# Altium PCB Maxi Gamer 3D - Rev 1.0_2023-02-27.pcbdoc
Units mil, origin at the board's own origin, x right, y up, seen from the top; angles counter-clockwise.
Board outline 3865 x 2599.17 mil, 2 copper layers (Top Layer, Bottom Layer); 2 components, 0 nets, 331 pads, 156 vias.
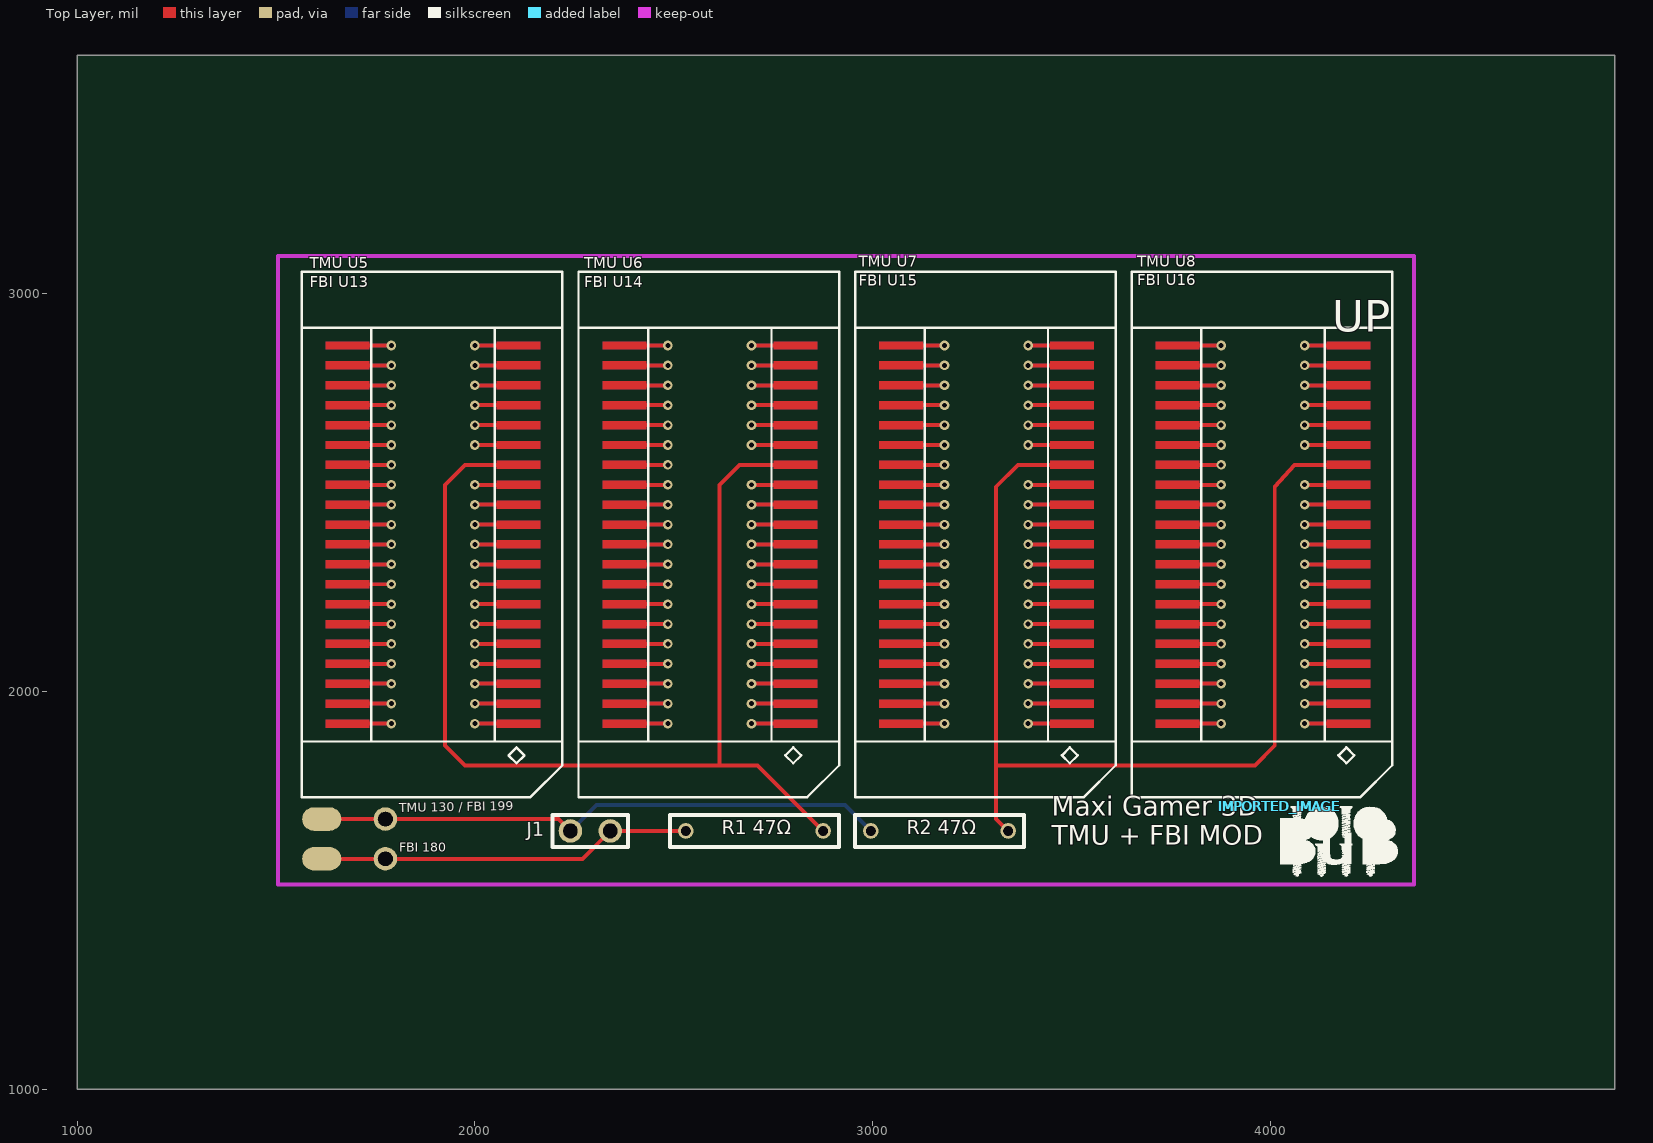
[diagram p0: Top Layer view]
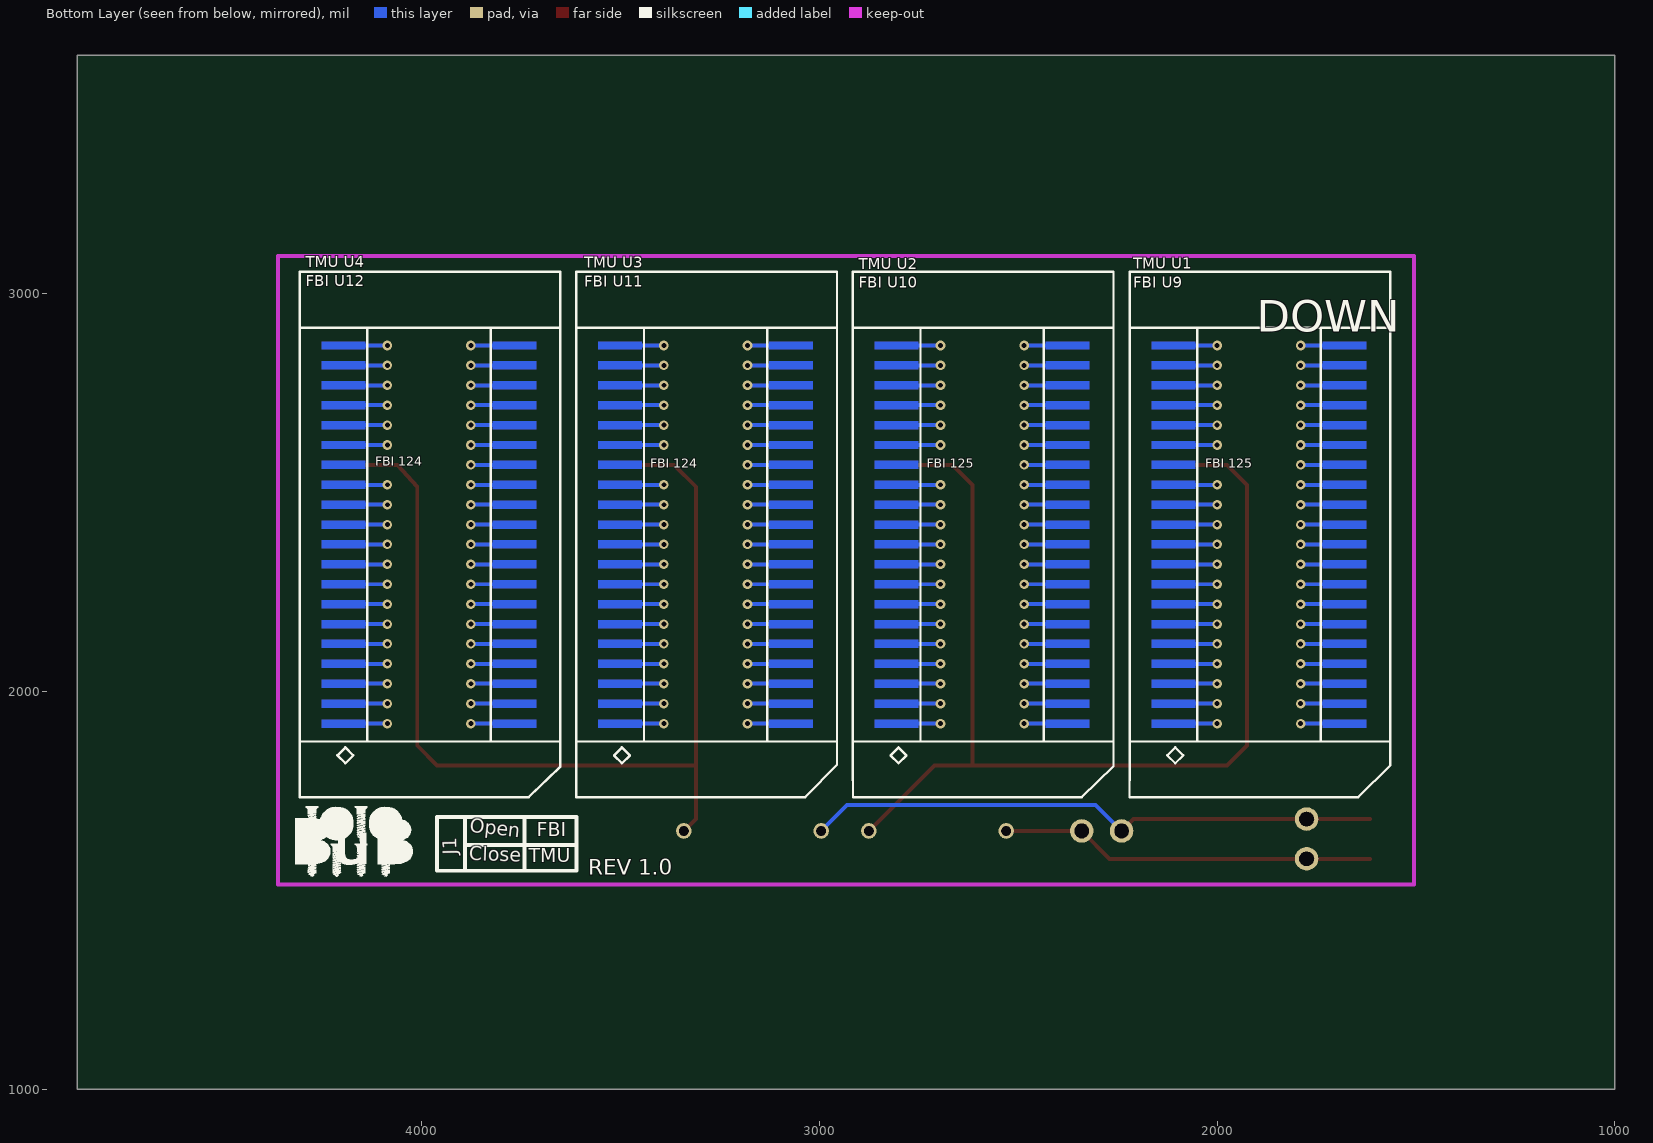
[diagram p1: Bottom Layer view, seen from below]

## Layer stack, top to bottom
Top Layer: signal copper (thickness not stored)
Dielectric: dielectric 12.6, FR-4, Dk 4.8
Bottom Layer: signal copper (thickness not stored)

## Board outline
4865,1000 1000,1000 1000,3599.17 4865,3599.17

## Components (designator, comment, footprint, x,y, rotation, side; value= is the part's Value field where it differs from the comment)
IMPORTED_IMAGE "IMPORTED_IMAGE" IMPORTED_IMAGE 4023.88,1711.23 r0 top
IMPORTED_IMAGE "IMPORTED_IMAGE" IMPORTED_IMAGE 4020.85,1711.23 r0 top

## Footprints (in the part's own frame and the unit in brackets; to place one, negate y for a bottom-side part, rotate by r counter-clockwise, add the part's x,y. Pads: shape width x height; smd on the part's side, far side on the other; paste and mask are expansions set on the pad)
IMPORTED_IMAGE [mil]
  silkscreen extent 0,-177 295,0

## Free pads (board coordinates)
  round 0 smd: 1(2109.36,1919.17) 1(2805.01,1919.17) 1(3500.01,1919.17) 1(4195.01,1919.17) 2(2109.36,1969.17) 2(2805.01,1969.17) 2(3500.01,1969.17) 2(4195.01,1969.17) 3(2109.36,2019.17) 3(2805.01,2019.17) 3(3500.01,2019.17) 3(4195.01,2019.17) 4(2109.36,2069.17) 4(2805.01,2069.17) 4(3500.01,2069.17) 4(4195.01,2069.17) 5(2109.36,2119.17) 5(2805.01,2119.17) 5(3500.01,2119.17) 5(4195.01,2119.17) 6(2109.36,2169.17) 6(2805.01,2169.17) 6(3500.01,2169.17) 6(4195.01,2169.17) 7(2109.36,2219.17) 7(2805.01,2219.17) 7(3500.01,2219.17) 7(4195.01,2219.17) 8(2109.36,2269.17) 8(2805.01,2269.17) 8(3500.01,2269.17) 8(4195.01,2269.17) 9(2109.36,2319.17) 9(2805.01,2319.17) 9(3500.01,2319.17) 9(4195.01,2319.17) 10(2109.36,2369.17) 10(2805.01,2369.17) 10(3500.01,2369.17) 10(4195.01,2369.17) 11(2109.36,2419.17) 11(2805.01,2419.17) 11(3500.01,2419.17) 11(4195.01,2419.17) 12(2109.36,2469.17) 12(2805.01,2469.17) 12(3500.01,2469.17) 12(4195.01,2469.17) 13(2109.36,2519.17) 13(2805.01,2519.17) 13(3500.01,2519.17) 13(4195.01,2519.17) 14(2109.36,2569.17) 14(2805.01,2569.17) 14(3500.01,2569.17) 14(4195.01,2569.17) 15(2109.36,2619.17) 15(2805.01,2619.17) 15(3500.01,2619.17) 15(4195.01,2619.17) 16(2109.36,2669.17) 16(2805.01,2669.17) 16(3500.01,2669.17) 16(4195.01,2669.17) 17(2109.36,2719.17) 17(2805.01,2719.17) 17(3500.01,2719.17) 17(4195.01,2719.17) 18(2109.36,2769.17) 18(2805.01,2769.17) 18(3500.01,2769.17) 18(4195.01,2769.17) 19(2109.36,2819.17) 19(2805.01,2819.17) 19(3500.01,2819.17) 19(4195.01,2819.17) 20(2109.36,2869.17) 20(2805.01,2869.17) 20(3500.01,2869.17) 20(4195.01,2869.17) 21(1679.99,2869.17) 21(2375.64,2869.17) 21(2375.64,2869.17) 21(3070.64,2869.17) 21(3765.64,2869.17) 22(1679.99,2819.17) 22(2375.64,2819.17) 22(3070.64,2819.17) 22(3765.64,2819.17) 23(1679.99,2769.17) 23(2375.64,2769.17) 23(3070.64,2769.17) 23(3765.64,2769.17) 24(1679.99,2719.17) 24(2375.64,2719.17) 24(3070.64,2719.17) 24(3765.64,2719.17) 25(1679.99,2669.17) 25(2375.64,2669.17) 25(3070.64,2669.17) 25(3765.64,2669.17) 26(1679.99,2619.17) 26(2375.64,2619.17) 26(3070.64,2619.17) 26(3765.64,2619.17) 27(1679.99,2569.17) 27(2375.64,2569.17) 27(3070.64,2569.17) 27(3765.64,2569.17) 28(1679.99,2519.17) 28(2375.64,2519.17) 28(3070.64,2519.17) 28(3765.64,2519.17) 29(1679.99,2469.17) 29(2375.64,2469.17) 29(3070.64,2469.17) 29(3765.64,2469.17) 30(1679.99,2419.17) 30(2375.64,2419.17) 30(3070.64,2419.17) 30(3765.64,2419.17) 31(1679.99,2369.17) 31(2375.64,2369.17) 31(3070.64,2369.17) 31(3765.64,2369.17) 32(1679.99,2319.17) 32(2375.64,2319.17) 32(3070.64,2319.17) 32(3765.64,2319.17) 33(1679.99,2269.17) 33(2375.64,2269.17) 33(3070.64,2269.17) 33(3765.64,2269.17) 34(1679.99,2219.17) 34(2375.64,2219.17) 34(3070.64,2219.17) 34(3765.64,2219.17) 35(1679.99,2169.17) 35(2375.64,2169.17) 35(3070.64,2169.17) 35(3765.64,2169.17) 36(1679.99,2119.17) 36(2375.64,2119.17) 36(3070.64,2119.17) 36(3765.64,2119.17) 37(1679.99,2069.17) 37(2375.64,2069.17) 37(3070.64,2069.17) 37(3765.64,2069.17) 38(1679.99,2019.17) 38(2375.64,2019.17) 38(3070.64,2019.17) 38(3765.64,2019.17) 39(1679.99,1969.17) 39(2375.64,1969.17) 39(3070.64,1969.17) 39(3765.64,1969.17) 40(1679.99,1919.17) 40(2375.64,1919.17) 40(3070.64,1919.17) 40(3765.64,1919.17)
  round 0 smd far side: 1(2109.36,1919.17) 1(2805.01,1919.17) 1(3500.01,1919.17) 1(4195.01,1919.17) 2(2109.36,1969.17) 2(2805.01,1969.17) 2(3500.01,1969.17) 2(4195.01,1969.17) 3(2109.36,2019.17) 3(2805.01,2019.17) 3(3500.01,2019.17) 3(4195.01,2019.17) 4(2109.36,2069.17) 4(2805.01,2069.17) 4(3500.01,2069.17) 4(4195.01,2069.17) 5(2109.36,2119.17) 5(2805.01,2119.17) 5(3500.01,2119.17) 5(4195.01,2119.17) 6(2109.36,2169.17) 6(2805.01,2169.17) 6(3500.01,2169.17) 6(4195.01,2169.17) 7(2109.36,2219.17) 7(2805.01,2219.17) 7(3500.01,2219.17) 7(4195.01,2219.17) 8(2109.36,2269.17) 8(2805.01,2269.17) 8(3500.01,2269.17) 8(4195.01,2269.17) 9(2109.36,2319.17) 9(2805.01,2319.17) 9(3500.01,2319.17) 9(4195.01,2319.17) 10(2109.36,2369.17) 10(2805.01,2369.17) 10(3500.01,2369.17) 10(4195.01,2369.17) 11(2109.36,2419.17) 11(2805.01,2419.17) 11(3500.01,2419.17) 11(4195.01,2419.17) 12(2109.36,2469.17) 12(2805.01,2469.17) 12(3500.01,2469.17) 12(4195.01,2469.17) 13(2109.36,2519.17) 13(2805.01,2519.17) 13(3500.01,2519.17) 13(4195.01,2519.17) 14(2109.36,2569.17) 14(2805.01,2569.17) 14(3500.01,2569.17) 14(4195.01,2569.17) 15(2109.36,2619.17) 15(2805.01,2619.17) 15(3500.01,2619.17) 15(4195.01,2619.17) 16(2109.36,2669.17) 16(2805.01,2669.17) 16(3500.01,2669.17) 16(4195.01,2669.17) 17(2109.36,2719.17) 17(2805.01,2719.17) 17(3500.01,2719.17) 17(4195.01,2719.17) 18(2109.36,2769.17) 18(2805.01,2769.17) 18(3500.01,2769.17) 18(4195.01,2769.17) 19(2109.36,2819.17) 19(2805.01,2819.17) 19(3500.01,2819.17) 19(4195.01,2819.17) 20(2109.36,2869.17) 20(2805.01,2869.17) 20(3500.01,2869.17) 20(4195.01,2869.17) 21(1679.99,2869.17) 21(2375.64,2869.17) 21(3070.64,2869.17) 21(3765.64,2869.17) 22(1679.99,2819.17) 22(2375.64,2819.17) 22(3070.64,2819.17) 22(3765.64,2819.17) 23(1679.99,2769.17) 23(2375.64,2769.17) 23(3070.64,2769.17) 23(3765.64,2769.17) 24(1679.99,2719.17) 24(2375.64,2719.17) 24(3070.64,2719.17) 24(3765.64,2719.17) 25(1679.99,2669.17) 25(2375.64,2669.17) 25(3070.64,2669.17) 25(3765.64,2669.17) 26(1679.99,2619.17) 26(2375.64,2619.17) 26(3070.64,2619.17) 26(3765.64,2619.17) 27(1679.99,2569.17) 27(2375.64,2569.17) 27(3070.64,2569.17) 27(3765.64,2569.17) 28(1679.99,2519.17) 28(2375.64,2519.17) 28(3070.64,2519.17) 28(3765.64,2519.17) 29(1679.99,2469.17) 29(2375.64,2469.17) 29(3070.64,2469.17) 29(3765.64,2469.17) 30(1679.99,2419.17) 30(2375.64,2419.17) 30(3070.64,2419.17) 30(3765.64,2419.17) 31(1679.99,2369.17) 31(2375.64,2369.17) 31(3070.64,2369.17) 31(3765.64,2369.17) 32(1679.99,2319.17) 32(2375.64,2319.17) 32(3070.64,2319.17) 32(3765.64,2319.17) 33(1679.99,2269.17) 33(2375.64,2269.17) 33(3070.64,2269.17) 33(3765.64,2269.17) 34(1679.99,2219.17) 34(2375.64,2219.17) 34(3070.64,2219.17) 34(3765.64,2219.17) 35(1679.99,2169.17) 35(2375.64,2169.17) 35(3070.64,2169.17) 35(3765.64,2169.17) 36(1679.99,2119.17) 36(2375.64,2119.17) 36(3070.64,2119.17) 36(3765.64,2119.17) 37(1679.99,2069.17) 37(2375.64,2069.17) 37(3070.64,2069.17) 37(3765.64,2069.17) 38(1679.99,2019.17) 38(2375.64,2019.17) 38(3070.64,2019.17) 38(3765.64,2019.17) 39(1679.99,1969.17) 39(2375.64,1969.17) 39(3070.64,1969.17) 39(3765.64,1969.17) 40(1679.99,1919.17) 40(2375.64,1919.17) 40(3070.64,1919.17) 40(3765.64,1919.17)
  oval 98.42x59.05 smd: ""(1615,1579.17) ""(1615,1679.17)
  round 59.05 hole 35.43 slot 37.4 at 0 deg: ""(1775,1579.17) ""(1775,1679.17)
  round 59.05 hole 35.43 slot 37.4 at 90 deg: ""(2240,1649.17) ""(2340,1649.17)
  round 39.37 hole 24 slot 24.2 at 90 deg: ""(2530,1649.17) ""(2875,1649.17) ""(2995,1649.17) ""(3340,1649.17)

## Via types
v1: diameter 24, hole 12, Top Layer to Bottom Layer, tented both sides, 156 vias

## Nets (pads, with @x,y where several pads share a name; then routed paths per layer and width w, separated by ;. In a path a pad name is that pad's centre, name@x,y a point inside that pad or via, vN(x,y) a via of type N, cw(c..) or ccw(c..) an arc to the next point about the centre after c; other vN are vias at no path point)
copper on no net: | length 42094.2
  Top Layer w10: 1615,1579.17 1775,1579.17 2270,1579.17 2340,1649.17 2530,1649.17 ; 1615,1679.17 1775,1679.17 2210,1679.17 2240,1649.17 ; 1680,1919.17 v1(1790,1919.17) ; 1680,1969.17 v1(1790,1969.17) ; 1680,2019.17 v1(1790,2019.17) ; 1680,2069.17 v1(1790,2069.17) ; 1680,2119.17 v1(1790,2119.17) ; 1680,2169.17 v1(1790,2169.17) ; 1680,2219.17 v1(1790,2219.17) ; 1680,2269.17 v1(1790,2269.17) ; 1680,2319.17 v1(1790,2319.17) ; 1680,2369.17 v1(1790,2369.17) ; 1680,2419.17 v1(1790,2419.17) ; 1680,2469.17 v1(1790,2469.17) ; 1680,2519.17 v1(1790,2519.17) ; 1680,2569.17 v1(1790,2569.17) ; 1680,2619.17 v1(1790,2619.17) ; 1680,2669.17 v1(1790,2669.17) ; 1680,2719.17 v1(1790,2719.17) ; 1680,2769.17 v1(1790,2769.17) ; 1680,2819.17 v1(1790,2819.17) ; 1680,2869.17 v1(1790,2869.17) ; v1(2000,1919.17) 2109.36,1919.17 ; v1(2000,1969.17) 2109.36,1969.17 ; v1(2000,2019.17) 2109.36,2019.17 ; v1(2000,2069.17) 2109.36,2069.17 ; v1(2000,2119.17) 2109.36,2119.17 ; v1(2000,2169.17) 2109.36,2169.17 ; v1(2000,2219.17) 2109.36,2219.17 ; v1(2000,2269.17) 2109.36,2269.17 ; v1(2000,2319.17) 2109.36,2319.17 ; v1(2000,2369.17) 2109.36,2369.17 ; v1(2000,2419.17) 2109.36,2419.17 ; v1(2000,2469.17) 2109.36,2469.17 ; v1(2000,2519.17) 2109.36,2519.17 ; v1(2000,2619.17) 2109.36,2619.17 ; v1(2000,2669.17) 2109.36,2669.17 ; v1(2000,2719.17) 2109.36,2719.17 ; v1(2000,2769.17) 2109.36,2769.17 ; v1(2000,2819.17) 2109.36,2819.17 ; v1(2000,2869.17) 2109.36,2869.17 ; 2109.36,2569.17 1975,2569.17 1925,2519.17 1925,1864.17 1975,1814.17 2615,1814.17 ; 2375.64,1919.17 v1(2485,1919.17) ; 2375.64,1969.17 v1(2485,1969.17) ; 2375.64,2019.17 v1(2485,2019.17) ; 2375.64,2069.17 v1(2485,2069.17) ; 2375.64,2119.17 v1(2485,2119.17) ; 2375.64,2169.17 v1(2485,2169.17) ; 2375.64,2219.17 v1(2485,2219.17) ; 2375.64,2269.17 v1(2485,2269.17) ; 2375.64,2319.17 v1(2485,2319.17) ; 2375.64,2369.17 v1(2485,2369.17) ; 2375.64,2419.17 v1(2485,2419.17) ; 2375.64,2469.17 v1(2485,2469.17) ; 2375.64,2519.17 v1(2485,2519.17) ; 2375.64,2569.17 v1(2485,2569.17) ; 2375.64,2619.17 v1(2485,2619.17) ; 2375.64,2669.17 v1(2485,2669.17) ; 2375.64,2719.17 v1(2485,2719.17) ; 2375.64,2769.17 v1(2485,2769.17) ; 2375.64,2819.17 v1(2485,2819.17) ; 2375.64,2869.17 v1(2485,2869.17) ; v1(2695,1919.17) 2805,1919.17 ; v1(2695,1969.17) 2805,1969.17 ; v1(2695,2019.17) 2805,2019.17 ; v1(2695,2069.17) 2805,2069.17 ; v1(2695,2119.17) 2805,2119.17 ; v1(2695,2169.17) 2805,2169.17 ; v1(2695,2219.17) 2805,2219.17 ; v1(2695,2269.17) 2805,2269.17 ; v1(2695,2319.17) 2805,2319.17 ; v1(2695,2369.17) 2805,2369.17 ; v1(2695,2419.17) 2805,2419.17 ; v1(2695,2469.17) 2805,2469.17 ; v1(2695,2519.17) 2805,2519.17 ; v1(2695,2619.17) 2805,2619.17 ; v1(2695,2669.17) 2805,2669.17 ; v1(2695,2719.17) 2805,2719.17 ; v1(2695,2769.17) 2805,2769.17 ; v1(2695,2819.17) 2805,2819.17 ; v1(2695,2869.17) 2805,2869.17 ; 2805,2569.17 2665,2569.17 2615,2519.17 2615,1814.17 ; 2875,1649.17 2710,1814.17 2615,1814.17 ; 3070.64,1919.17 v1(3180,1919.17) ; 3070.64,1969.17 v1(3180,1969.17) ; 3070.64,2019.17 v1(3180,2019.17) ; 3070.64,2069.17 v1(3180,2069.17) ; 3070.64,2119.17 v1(3180,2119.17) ; 3070.64,2169.17 v1(3180,2169.17) ; 3070.64,2219.17 v1(3180,2219.17) ; 3070.64,2269.17 v1(3180,2269.17) ; 3070.64,2319.17 v1(3180,2319.17) ; 3070.64,2369.17 v1(3180,2369.17) ; 3070.64,2419.17 v1(3180,2419.17) ; 3070.64,2469.17 v1(3180,2469.17) ; 3070.64,2519.17 v1(3180,2519.17) ; 3070.64,2569.17 v1(3180,2569.17) ; 3070.64,2619.17 v1(3180,2619.17) ; 3070.64,2669.17 v1(3180,2669.17) ; 3070.64,2719.17 v1(3180,2719.17) ; 3070.64,2769.17 v1(3180,2769.17) ; 3070.64,2819.17 v1(3180,2819.17) ; 3070.64,2869.17 v1(3180,2869.17) ; 3340,1649.17 3310,1679.17 3310,1814.17 ; v1(3390,1919.17) 3500,1919.17 ; v1(3390,1969.17) 3500,1969.17 ; v1(3390,2019.17) 3500,2019.17 ; v1(3390,2069.17) 3500,2069.17 ; v1(3390,2119.17) 3500,2119.17 ; v1(3390,2169.17) 3500,2169.17 ; v1(3390,2219.17) 3500,2219.17 ; v1(3390,2269.17) 3500,2269.17 ; v1(3390,2319.17) 3500,2319.17 ; v1(3390,2369.17) 3500,2369.17 ; v1(3390,2419.17) 3500,2419.17 ; v1(3390,2469.17) 3500,2469.17 ; v1(3390,2519.17) 3500,2519.17 ; v1(3390,2619.17) 3500,2619.17 ; v1(3390,2669.17) 3500,2669.17 ; v1(3390,2719.17) 3500,2719.17 ; v1(3390,2769.17) 3500,2769.17 ; v1(3390,2819.17) 3500,2819.17 ; v1(3390,2869.17) 3500,2869.17 ; 3500,2569.17 3365,2569.17 3310,2514.17 3310,1814.17 ; 3765.64,1919.17 v1(3875,1919.17) ; 3765.64,1969.17 v1(3875,1969.17) ; 3765.64,2019.17 v1(3875,2019.17) ; 3765.64,2069.17 v1(3875,2069.17) ; 3765.64,2119.17 v1(3875,2119.17) ; 3765.64,2169.17 v1(3875,2169.17) ; 3765.64,2219.17 v1(3875,2219.17) ; 3765.64,2269.17 v1(3875,2269.17) ; 3765.64,2319.17 v1(3875,2319.17) ; 3765.64,2369.17 v1(3875,2369.17) ; 3765.64,2419.17 v1(3875,2419.17) ; 3765.64,2469.17 v1(3875,2469.17) ; 3765.64,2519.17 v1(3875,2519.17) ; 3765.64,2569.17 v1(3875,2569.17) ; 3765.64,2619.17 v1(3875,2619.17) ; 3765.64,2669.17 v1(3875,2669.17) ; 3765.64,2719.17 v1(3875,2719.17) ; 3765.64,2769.17 v1(3875,2769.17) ; 3765.64,2819.17 v1(3875,2819.17) ; 3765.64,2869.17 v1(3875,2869.17) ; v1(4085,1919.17) 4195,1919.17 ; v1(4085,1969.17) 4195,1969.17 ; v1(4085,2019.17) 4195,2019.17 ; v1(4085,2069.17) 4195,2069.17 ; v1(4085,2119.17) 4195,2119.17 ; v1(4085,2169.17) 4195,2169.17 ; v1(4085,2219.17) 4195,2219.17 ; v1(4085,2269.17) 4195,2269.17 ; v1(4085,2319.17) 4195,2319.17 ; v1(4085,2369.17) 4195,2369.17 ; v1(4085,2419.17) 4195,2419.17 ; v1(4085,2469.17) 4195,2469.17 ; v1(4085,2519.17) 4195,2519.17 ; v1(4085,2619.17) 4195,2619.17 ; v1(4085,2669.17) 4195,2669.17 ; v1(4085,2719.17) 4195,2719.17 ; v1(4085,2769.17) 4195,2769.17 ; v1(4085,2819.17) 4195,2819.17 ; v1(4085,2869.17) 4195,2869.17 ; 4195,2569.17 4060,2569.17 4010,2514.17 4010,1864.17 3960,1814.17 3310,1814.17
  Bottom Layer w10: 1680,1919.17 v1(1790,1919.17) ; 1680,1969.17 v1(1790,1969.17) ; 1680,2019.17 v1(1790,2019.17) ; 1680,2069.17 v1(1790,2069.17) ; 1680,2119.17 v1(1790,2119.17) ; 1680,2169.17 v1(1790,2169.17) ; 1680,2219.17 v1(1790,2219.17) ; 1680,2269.17 v1(1790,2269.17) ; 1680,2319.17 v1(1790,2319.17) ; 1680,2369.17 v1(1790,2369.17) ; 1680,2419.17 v1(1790,2419.17) ; 1680,2469.17 v1(1790,2469.17) ; 1680,2519.17 v1(1790,2519.17) ; 1680,2569.17 v1(1790,2569.17) ; 1680,2619.17 v1(1790,2619.17) ; 1680,2669.17 v1(1790,2669.17) ; 1680,2719.17 v1(1790,2719.17) ; 1680,2769.17 v1(1790,2769.17) ; 1680,2819.17 v1(1790,2819.17) ; 1680,2869.17 v1(1790,2869.17) ; v1(2000,1919.17) 2109.36,1919.17 ; v1(2000,1969.17) 2109.36,1969.17 ; v1(2000,2019.17) 2109.36,2019.17 ; v1(2000,2069.17) 2109.36,2069.17 ; v1(2000,2119.17) 2109.36,2119.17 ; v1(2000,2169.17) 2109.36,2169.17 ; v1(2000,2219.17) 2109.36,2219.17 ; v1(2000,2269.17) 2109.36,2269.17 ; v1(2000,2319.17) 2109.36,2319.17 ; v1(2000,2369.17) 2109.36,2369.17 ; v1(2000,2419.17) 2109.36,2419.17 ; v1(2000,2469.17) 2109.36,2469.17 ; v1(2000,2519.17) 2109.36,2519.17 ; v1(2000,2619.17) 2109.36,2619.17 ; v1(2000,2669.17) 2109.36,2669.17 ; v1(2000,2719.17) 2109.36,2719.17 ; v1(2000,2769.17) 2109.36,2769.17 ; v1(2000,2819.17) 2109.36,2819.17 ; v1(2000,2869.17) 2109.36,2869.17 ; 2240,1649.17 2305,1714.17 2930,1714.17 2995,1649.17 ; 2375.64,1919.17 v1(2485,1919.17) ; 2375.64,1969.17 v1(2485,1969.17) ; 2375.64,2019.17 v1(2485,2019.17) ; 2375.64,2069.17 v1(2485,2069.17) ; 2375.64,2119.17 v1(2485,2119.17) ; 2375.64,2169.17 v1(2485,2169.17) ; 2375.64,2219.17 v1(2485,2219.17) ; 2375.64,2269.17 v1(2485,2269.17) ; 2375.64,2319.17 v1(2485,2319.17) ; 2375.64,2369.17 v1(2485,2369.17) ; 2375.64,2419.17 v1(2485,2419.17) ; 2375.64,2469.17 v1(2485,2469.17) ; 2375.64,2519.17 v1(2485,2519.17) ; 2375.64,2569.17 v1(2485,2569.17) ; 2375.64,2619.17 v1(2485,2619.17) ; 2375.64,2669.17 v1(2485,2669.17) ; 2375.64,2719.17 v1(2485,2719.17) ; 2375.64,2769.17 v1(2485,2769.17) ; 2375.64,2819.17 v1(2485,2819.17) ; 2375.64,2869.17 v1(2485,2869.17) ; v1(2695,1919.17) 2805,1919.17 ; v1(2695,1969.17) 2805,1969.17 ; v1(2695,2019.17) 2805,2019.17 ; v1(2695,2069.17) 2805,2069.17 ; v1(2695,2119.17) 2805,2119.17 ; v1(2695,2169.17) 2805,2169.17 ; v1(2695,2219.17) 2805,2219.17 ; v1(2695,2269.17) 2805,2269.17 ; v1(2695,2319.17) 2805,2319.17 ; v1(2695,2369.17) 2805,2369.17 ; v1(2695,2419.17) 2805,2419.17 ; v1(2695,2469.17) 2805,2469.17 ; v1(2695,2519.17) 2805,2519.17 ; v1(2695,2619.17) 2805,2619.17 ; v1(2695,2669.17) 2805,2669.17 ; v1(2695,2719.17) 2805,2719.17 ; v1(2695,2769.17) 2805,2769.17 ; v1(2695,2819.17) 2805,2819.17 ; v1(2695,2869.17) 2805,2869.17 ; 3070.64,1919.17 v1(3180,1919.17) ; 3070.64,1969.17 v1(3180,1969.17) ; 3070.64,2019.17 v1(3180,2019.17) ; 3070.64,2069.17 v1(3180,2069.17) ; 3070.64,2119.17 v1(3180,2119.17) ; 3070.64,2169.17 v1(3180,2169.17) ; 3070.64,2219.17 v1(3180,2219.17) ; 3070.64,2269.17 v1(3180,2269.17) ; 3070.64,2319.17 v1(3180,2319.17) ; 3070.64,2369.17 v1(3180,2369.17) ; 3070.64,2419.17 v1(3180,2419.17) ; 3070.64,2469.17 v1(3180,2469.17) ; 3070.64,2519.17 v1(3180,2519.17) ; 3070.64,2569.17 v1(3180,2569.17) ; 3070.64,2619.17 v1(3180,2619.17) ; 3070.64,2669.17 v1(3180,2669.17) ; 3070.64,2719.17 v1(3180,2719.17) ; 3070.64,2769.17 v1(3180,2769.17) ; 3070.64,2819.17 v1(3180,2819.17) ; 3070.64,2869.17 v1(3180,2869.17) ; v1(3390,1919.17) 3500,1919.17 ; v1(3390,1969.17) 3500,1969.17 ; v1(3390,2019.17) 3500,2019.17 ; v1(3390,2069.17) 3500,2069.17 ; v1(3390,2119.17) 3500,2119.17 ; v1(3390,2169.17) 3500,2169.17 ; v1(3390,2219.17) 3500,2219.17 ; v1(3390,2269.17) 3500,2269.17 ; v1(3390,2319.17) 3500,2319.17 ; v1(3390,2369.17) 3500,2369.17 ; v1(3390,2419.17) 3500,2419.17 ; v1(3390,2469.17) 3500,2469.17 ; v1(3390,2519.17) 3500,2519.17 ; v1(3390,2619.17) 3500,2619.17 ; v1(3390,2669.17) 3500,2669.17 ; v1(3390,2719.17) 3500,2719.17 ; v1(3390,2769.17) 3500,2769.17 ; v1(3390,2819.17) 3500,2819.17 ; v1(3390,2869.17) 3500,2869.17 ; 3765.64,1919.17 v1(3875,1919.17) ; 3765.64,1969.17 v1(3875,1969.17) ; 3765.64,2019.17 v1(3875,2019.17) ; 3765.64,2069.17 v1(3875,2069.17) ; 3765.64,2119.17 v1(3875,2119.17) ; 3765.64,2169.17 v1(3875,2169.17) ; 3765.64,2219.17 v1(3875,2219.17) ; 3765.64,2269.17 v1(3875,2269.17) ; 3765.64,2319.17 v1(3875,2319.17) ; 3765.64,2369.17 v1(3875,2369.17) ; 3765.64,2419.17 v1(3875,2419.17) ; 3765.64,2469.17 v1(3875,2469.17) ; 3765.64,2519.17 v1(3875,2519.17) ; 3765.64,2569.17 v1(3875,2569.17) ; 3765.64,2619.17 v1(3875,2619.17) ; 3765.64,2669.17 v1(3875,2669.17) ; 3765.64,2719.17 v1(3875,2719.17) ; 3765.64,2769.17 v1(3875,2769.17) ; 3765.64,2819.17 v1(3875,2819.17) ; 3765.64,2869.17 v1(3875,2869.17) ; v1(4085,1919.17) 4195,1919.17 ; v1(4085,1969.17) 4195,1969.17 ; v1(4085,2019.17) 4195,2019.17 ; v1(4085,2069.17) 4195,2069.17 ; v1(4085,2119.17) 4195,2119.17 ; v1(4085,2169.17) 4195,2169.17 ; v1(4085,2219.17) 4195,2219.17 ; v1(4085,2269.17) 4195,2269.17 ; v1(4085,2319.17) 4195,2319.17 ; v1(4085,2369.17) 4195,2369.17 ; v1(4085,2419.17) 4195,2419.17 ; v1(4085,2469.17) 4195,2469.17 ; v1(4085,2519.17) 4195,2519.17 ; v1(4085,2619.17) 4195,2619.17 ; v1(4085,2669.17) 4195,2669.17 ; v1(4085,2719.17) 4195,2719.17 ; v1(4085,2769.17) 4195,2769.17 ; v1(4085,2819.17) 4195,2819.17 ; v1(4085,2869.17) 4195,2869.17

## Other copper
Top Layer:
  region: 2054.68,2559.17 2054.68,2579.17 2164.05,2579.17 2164.05,2559.17
  region: 2750.32,2559.17 2750.32,2579.17 2859.69,2579.17 2859.69,2559.17
  region: 3445.32,2559.17 3445.32,2579.17 3554.69,2579.17 3554.69,2559.17
  region: 4140.32,2559.17 4140.32,2579.17 4249.69,2579.17 4249.69,2559.17
  region: 1625.31,2859.17 1625.31,2879.17 1734.68,2879.17 1734.68,2859.17
  region: 1625.31,2809.17 1625.31,2829.17 1734.68,2829.17 1734.68,2809.17
  region: 1625.31,2759.17 1625.31,2779.17 1734.68,2779.17 1734.68,2759.17
  region: 1625.31,2709.17 1625.31,2729.17 1734.68,2729.17 1734.68,2709.17
  region: 1625.31,2659.17 1625.31,2679.17 1734.68,2679.17 1734.68,2659.17
  region: 1625.31,2609.17 1625.31,2629.17 1734.68,2629.17 1734.68,2609.17
  region: 1625.31,2559.17 1625.31,2579.17 1734.68,2579.17 1734.68,2559.17
  region: 1625.31,2509.17 1625.31,2529.17 1734.68,2529.17 1734.68,2509.17
  region: 1625.31,2459.17 1625.31,2479.17 1734.68,2479.17 1734.68,2459.17
  region: 1625.31,2409.17 1625.31,2429.17 1734.68,2429.17 1734.68,2409.17
  region: 1625.31,2359.17 1625.31,2379.17 1734.68,2379.17 1734.68,2359.17
  region: 1625.31,2309.17 1625.31,2329.17 1734.68,2329.17 1734.68,2309.17
  region: 1625.31,2259.17 1625.31,2279.17 1734.68,2279.17 1734.68,2259.17
  region: 1625.31,2209.17 1625.31,2229.17 1734.68,2229.17 1734.68,2209.17
  region: 1625.31,2159.17 1625.31,2179.17 1734.68,2179.17 1734.68,2159.17
  region: 1625.31,2109.17 1625.31,2129.17 1734.68,2129.17 1734.68,2109.17
  region: 1625.31,2059.17 1625.31,2079.17 1734.68,2079.17 1734.68,2059.17
  region: 1625.31,2009.17 1625.31,2029.17 1734.68,2029.17 1734.68,2009.17
  region: 1625.31,1959.17 1625.31,1979.17 1734.68,1979.17 1734.68,1959.17
  region: 1625.31,1909.17 1625.31,1929.17 1734.68,1929.17 1734.68,1909.17
  region: 2054.68,2859.17 2054.68,2879.17 2164.05,2879.17 2164.05,2859.17
  region: 2054.68,2809.17 2054.68,2829.17 2164.05,2829.17 2164.05,2809.17
  region: 2054.68,2759.17 2054.68,2779.17 2164.05,2779.17 2164.05,2759.17
  region: 2054.68,2709.17 2054.68,2729.17 2164.05,2729.17 2164.05,2709.17
  region: 2054.68,2659.17 2054.68,2679.17 2164.05,2679.17 2164.05,2659.17
  region: 2054.68,2609.17 2054.68,2629.17 2164.05,2629.17 2164.05,2609.17
  region: 2054.68,2509.17 2054.68,2529.17 2164.05,2529.17 2164.05,2509.17
  region: 2054.68,2459.17 2054.68,2479.17 2164.05,2479.17 2164.05,2459.17
  region: 2054.68,2409.17 2054.68,2429.17 2164.05,2429.17 2164.05,2409.17
  region: 2054.68,2359.17 2054.68,2379.17 2164.05,2379.17 2164.05,2359.17
  region: 2054.68,2309.17 2054.68,2329.17 2164.05,2329.17 2164.05,2309.17
  region: 2054.68,2259.17 2054.68,2279.17 2164.05,2279.17 2164.05,2259.17
  region: 2054.68,2209.17 2054.68,2229.17 2164.05,2229.17 2164.05,2209.17
  region: 2054.68,2159.17 2054.68,2179.17 2164.05,2179.17 2164.05,2159.17
  region: 2054.68,2109.17 2054.68,2129.17 2164.05,2129.17 2164.05,2109.17
  region: 2054.68,2059.17 2054.68,2079.17 2164.05,2079.17 2164.05,2059.17
  region: 2054.68,2009.17 2054.68,2029.17 2164.05,2029.17 2164.05,2009.17
  region: 2054.68,1959.17 2054.68,1979.17 2164.05,1979.17 2164.05,1959.17
  region: 2054.68,1909.17 2054.68,1929.17 2164.05,1929.17 2164.05,1909.17
  region: 2320.95,2859.17 2320.95,2879.17 2430.32,2879.17 2430.32,2859.17
  region: 2320.95,2859.17 2320.95,2879.17 2430.32,2879.17 2430.32,2859.17
  region: 2320.95,2809.17 2320.95,2829.17 2430.32,2829.17 2430.32,2809.17
  region: 2320.95,2759.17 2320.95,2779.17 2430.32,2779.17 2430.32,2759.17
  region: 2320.95,2709.17 2320.95,2729.17 2430.32,2729.17 2430.32,2709.17
  region: 2320.95,1909.17 2320.95,1929.17 2430.32,1929.17 2430.32,1909.17
  region: 2320.95,1959.17 2320.95,1979.17 2430.32,1979.17 2430.32,1959.17
  region: 2320.95,2009.17 2320.95,2029.17 2430.32,2029.17 2430.32,2009.17
  region: 2320.95,2059.17 2320.95,2079.17 2430.32,2079.17 2430.32,2059.17
  region: 2320.95,2109.17 2320.95,2129.17 2430.32,2129.17 2430.32,2109.17
  region: 2320.95,2159.17 2320.95,2179.17 2430.32,2179.17 2430.32,2159.17
  region: 2320.95,2209.17 2320.95,2229.17 2430.32,2229.17 2430.32,2209.17
  region: 2320.95,2259.17 2320.95,2279.17 2430.32,2279.17 2430.32,2259.17
  region: 2320.95,2309.17 2320.95,2329.17 2430.32,2329.17 2430.32,2309.17
  region: 2320.95,2359.17 2320.95,2379.17 2430.32,2379.17 2430.32,2359.17
  region: 2320.95,2409.17 2320.95,2429.17 2430.32,2429.17 2430.32,2409.17
  region: 2320.95,2459.17 2320.95,2479.17 2430.32,2479.17 2430.32,2459.17
  region: 2320.95,2509.17 2320.95,2529.17 2430.32,2529.17 2430.32,2509.17
  region: 2320.95,2559.17 2320.95,2579.17 2430.32,2579.17 2430.32,2559.17
  region: 2320.95,2609.17 2320.95,2629.17 2430.32,2629.17 2430.32,2609.17
  region: 2320.95,2659.17 2320.95,2679.17 2430.32,2679.17 2430.32,2659.17
  region: 2750.32,2859.17 2750.32,2879.17 2859.69,2879.17 2859.69,2859.17
  region: 2750.32,2809.17 2750.32,2829.17 2859.69,2829.17 2859.69,2809.17
  region: 2750.32,2759.17 2750.32,2779.17 2859.69,2779.17 2859.69,2759.17
  region: 2750.32,2709.17 2750.32,2729.17 2859.69,2729.17 2859.69,2709.17
  region: 2750.32,2659.17 2750.32,2679.17 2859.69,2679.17 2859.69,2659.17
  region: 2750.32,2609.17 2750.32,2629.17 2859.69,2629.17 2859.69,2609.17
  region: 2750.32,2509.17 2750.32,2529.17 2859.69,2529.17 2859.69,2509.17
  region: 2750.32,2459.17 2750.32,2479.17 2859.69,2479.17 2859.69,2459.17
  region: 2750.32,2409.17 2750.32,2429.17 2859.69,2429.17 2859.69,2409.17
  region: 2750.32,2359.17 2750.32,2379.17 2859.69,2379.17 2859.69,2359.17
  region: 2750.32,2309.17 2750.32,2329.17 2859.69,2329.17 2859.69,2309.17
  region: 2750.32,2259.17 2750.32,2279.17 2859.69,2279.17 2859.69,2259.17
  region: 2750.32,2209.17 2750.32,2229.17 2859.69,2229.17 2859.69,2209.17
  region: 2750.32,2159.17 2750.32,2179.17 2859.69,2179.17 2859.69,2159.17
  region: 2750.32,2109.17 2750.32,2129.17 2859.69,2129.17 2859.69,2109.17
  region: 2750.32,2059.17 2750.32,2079.17 2859.69,2079.17 2859.69,2059.17
  region: 2750.32,2009.17 2750.32,2029.17 2859.69,2029.17 2859.69,2009.17
  region: 2750.32,1959.17 2750.32,1979.17 2859.69,1979.17 2859.69,1959.17
  region: 2750.32,1909.17 2750.32,1929.17 2859.69,1929.17 2859.69,1909.17
  region: 3015.95,2859.17 3015.95,2879.17 3125.32,2879.17 3125.32,2859.17
  region: 3015.95,2809.17 3015.95,2829.17 3125.32,2829.17 3125.32,2809.17
  region: 3015.95,2759.17 3015.95,2779.17 3125.32,2779.17 3125.32,2759.17
  region: 3015.95,2709.17 3015.95,2729.17 3125.32,2729.17 3125.32,2709.17
  region: 3015.95,2659.17 3015.95,2679.17 3125.32,2679.17 3125.32,2659.17
  region: 3015.95,2609.17 3015.95,2629.17 3125.32,2629.17 3125.32,2609.17
  region: 3015.95,2559.17 3015.95,2579.17 3125.32,2579.17 3125.32,2559.17
  region: 3015.95,2509.17 3015.95,2529.17 3125.32,2529.17 3125.32,2509.17
  region: 3015.95,2459.17 3015.95,2479.17 3125.32,2479.17 3125.32,2459.17
  region: 3015.95,2409.17 3015.95,2429.17 3125.32,2429.17 3125.32,2409.17
  region: 3015.95,2359.17 3015.95,2379.17 3125.32,2379.17 3125.32,2359.17
  region: 3015.95,2309.17 3015.95,2329.17 3125.32,2329.17 3125.32,2309.17
  region: 3015.95,2259.17 3015.95,2279.17 3125.32,2279.17 3125.32,2259.17
  region: 3015.95,2209.17 3015.95,2229.17 3125.32,2229.17 3125.32,2209.17
  region: 3015.95,2159.17 3015.95,2179.17 3125.32,2179.17 3125.32,2159.17
  region: 3015.95,2109.17 3015.95,2129.17 3125.32,2129.17 3125.32,2109.17
  region: 3015.95,2059.17 3015.95,2079.17 3125.32,2079.17 3125.32,2059.17
  region: 3015.95,2009.17 3015.95,2029.17 3125.32,2029.17 3125.32,2009.17
  region: 3015.95,1959.17 3015.95,1979.17 3125.32,1979.17 3125.32,1959.17
  region: 3015.95,1909.17 3015.95,1929.17 3125.32,1929.17 3125.32,1909.17
  region: 3445.32,2859.17 3445.32,2879.17 3554.69,2879.17 3554.69,2859.17
  region: 3445.32,2809.17 3445.32,2829.17 3554.69,2829.17 3554.69,2809.17
  region: 3445.32,2759.17 3445.32,2779.17 3554.69,2779.17 3554.69,2759.17
  region: 3445.32,2709.17 3445.32,2729.17 3554.69,2729.17 3554.69,2709.17
  region: 3445.32,2659.17 3445.32,2679.17 3554.69,2679.17 3554.69,2659.17
  region: 3445.32,2609.17 3445.32,2629.17 3554.69,2629.17 3554.69,2609.17
  region: 3445.32,2509.17 3445.32,2529.17 3554.69,2529.17 3554.69,2509.17
  region: 3445.32,2459.17 3445.32,2479.17 3554.69,2479.17 3554.69,2459.17
  region: 3445.32,2409.17 3445.32,2429.17 3554.69,2429.17 3554.69,2409.17
  region: 3445.32,2359.17 3445.32,2379.17 3554.69,2379.17 3554.69,2359.17
  region: 3445.32,2309.17 3445.32,2329.17 3554.69,2329.17 3554.69,2309.17
  region: 3445.32,2259.17 3445.32,2279.17 3554.69,2279.17 3554.69,2259.17
  region: 3445.32,2209.17 3445.32,2229.17 3554.69,2229.17 3554.69,2209.17
  region: 3445.32,2159.17 3445.32,2179.17 3554.69,2179.17 3554.69,2159.17
  region: 3445.32,2109.17 3445.32,2129.17 3554.69,2129.17 3554.69,2109.17
  region: 3445.32,2059.17 3445.32,2079.17 3554.69,2079.17 3554.69,2059.17
  region: 3445.32,2009.17 3445.32,2029.17 3554.69,2029.17 3554.69,2009.17
  region: 3445.32,1959.17 3445.32,1979.17 3554.69,1979.17 3554.69,1959.17
  region: 3445.32,1909.17 3445.32,1929.17 3554.69,1929.17 3554.69,1909.17
  region: 3710.95,1909.17 3710.95,1929.17 3820.32,1929.17 3820.32,1909.17
  region: 3710.95,1959.17 3710.95,1979.17 3820.32,1979.17 3820.32,1959.17
  region: 3710.95,2009.17 3710.95,2029.17 3820.32,2029.17 3820.32,2009.17
  region: 3710.95,2059.17 3710.95,2079.17 3820.32,2079.17 3820.32,2059.17
  region: 3710.95,2109.17 3710.95,2129.17 3820.32,2129.17 3820.32,2109.17
  region: 3710.95,2159.17 3710.95,2179.17 3820.32,2179.17 3820.32,2159.17
  region: 3710.95,2209.17 3710.95,2229.17 3820.32,2229.17 3820.32,2209.17
  region: 3710.95,2259.17 3710.95,2279.17 3820.32,2279.17 3820.32,2259.17
  region: 3710.95,2309.17 3710.95,2329.17 3820.32,2329.17 3820.32,2309.17
  region: 3710.95,2359.17 3710.95,2379.17 3820.32,2379.17 3820.32,2359.17
  region: 3710.95,2409.17 3710.95,2429.17 3820.32,2429.17 3820.32,2409.17
  region: 3710.95,2459.17 3710.95,2479.17 3820.32,2479.17 3820.32,2459.17
  region: 3710.95,2509.17 3710.95,2529.17 3820.32,2529.17 3820.32,2509.17
  region: 3710.95,2559.17 3710.95,2579.17 3820.32,2579.17 3820.32,2559.17
  region: 3710.95,2609.17 3710.95,2629.17 3820.32,2629.17 3820.32,2609.17
  region: 3710.95,2659.17 3710.95,2679.17 3820.32,2679.17 3820.32,2659.17
  region: 3710.95,2709.17 3710.95,2729.17 3820.32,2729.17 3820.32,2709.17
  region: 3710.95,2759.17 3710.95,2779.17 3820.32,2779.17 3820.32,2759.17
  region: 3710.95,2809.17 3710.95,2829.17 3820.32,2829.17 3820.32,2809.17
  region: 3710.95,2859.17 3710.95,2879.17 3820.32,2879.17 3820.32,2859.17
  region: 4140.32,2859.17 4140.32,2879.17 4249.69,2879.17 4249.69,2859.17
  region: 4140.32,2809.17 4140.32,2829.17 4249.69,2829.17 4249.69,2809.17
  region: 4140.32,2759.17 4140.32,2779.17 4249.69,2779.17 4249.69,2759.17
  region: 4140.32,2709.17 4140.32,2729.17 4249.69,2729.17 4249.69,2709.17
  region: 4140.32,2659.17 4140.32,2679.17 4249.69,2679.17 4249.69,2659.17
  region: 4140.32,2609.17 4140.32,2629.17 4249.69,2629.17 4249.69,2609.17
  region: 4140.32,2509.17 4140.32,2529.17 4249.69,2529.17 4249.69,2509.17
  region: 4140.32,2459.17 4140.32,2479.17 4249.69,2479.17 4249.69,2459.17
  region: 4140.32,2409.17 4140.32,2429.17 4249.69,2429.17 4249.69,2409.17
  region: 4140.32,2359.17 4140.32,2379.17 4249.69,2379.17 4249.69,2359.17
  region: 4140.32,2309.17 4140.32,2329.17 4249.69,2329.17 4249.69,2309.17
  region: 4140.32,2259.17 4140.32,2279.17 4249.69,2279.17 4249.69,2259.17
  region: 4140.32,2209.17 4140.32,2229.17 4249.69,2229.17 4249.69,2209.17
  region: 4140.32,2159.17 4140.32,2179.17 4249.69,2179.17 4249.69,2159.17
  region: 4140.32,2109.17 4140.32,2129.17 4249.69,2129.17 4249.69,2109.17
  region: 4140.32,2059.17 4140.32,2079.17 4249.69,2079.17 4249.69,2059.17
  region: 4140.32,2009.17 4140.32,2029.17 4249.69,2029.17 4249.69,2009.17
  region: 4140.32,1959.17 4140.32,1979.17 4249.69,1979.17 4249.69,1959.17
  region: 4140.32,1909.17 4140.32,1929.17 4249.69,1929.17 4249.69,1909.17
Bottom Layer:
  region: 2054.68,2559.17 2054.68,2579.17 2164.05,2579.17 2164.05,2559.17
  region: 2750.32,2559.17 2750.32,2579.17 2859.69,2579.17 2859.69,2559.17
  region: 3445.32,2559.17 3445.32,2579.17 3554.69,2579.17 3554.69,2559.17
  region: 4140.32,2559.17 4140.32,2579.17 4249.69,2579.17 4249.69,2559.17
  region: 1625.31,2859.17 1625.31,2879.17 1734.68,2879.17 1734.68,2859.17
  region: 1625.31,2809.17 1625.31,2829.17 1734.68,2829.17 1734.68,2809.17
  region: 1625.31,2759.17 1625.31,2779.17 1734.68,2779.17 1734.68,2759.17
  region: 1625.31,2709.17 1625.31,2729.17 1734.68,2729.17 1734.68,2709.17
  region: 1625.31,2659.17 1625.31,2679.17 1734.68,2679.17 1734.68,2659.17
  region: 1625.31,2609.17 1625.31,2629.17 1734.68,2629.17 1734.68,2609.17
  region: 1625.31,2559.17 1625.31,2579.17 1734.68,2579.17 1734.68,2559.17
  region: 1625.31,2509.17 1625.31,2529.17 1734.68,2529.17 1734.68,2509.17
  region: 1625.31,2459.17 1625.31,2479.17 1734.68,2479.17 1734.68,2459.17
  region: 1625.31,2409.17 1625.31,2429.17 1734.68,2429.17 1734.68,2409.17
  region: 1625.31,2359.17 1625.31,2379.17 1734.68,2379.17 1734.68,2359.17
  region: 1625.31,2309.17 1625.31,2329.17 1734.68,2329.17 1734.68,2309.17
  region: 1625.31,2259.17 1625.31,2279.17 1734.68,2279.17 1734.68,2259.17
  region: 1625.31,2209.17 1625.31,2229.17 1734.68,2229.17 1734.68,2209.17
  region: 1625.31,2159.17 1625.31,2179.17 1734.68,2179.17 1734.68,2159.17
  region: 1625.31,2109.17 1625.31,2129.17 1734.68,2129.17 1734.68,2109.17
  region: 1625.31,2059.17 1625.31,2079.17 1734.68,2079.17 1734.68,2059.17
  region: 1625.31,2009.17 1625.31,2029.17 1734.68,2029.17 1734.68,2009.17
  region: 1625.31,1959.17 1625.31,1979.17 1734.68,1979.17 1734.68,1959.17
  region: 1625.31,1909.17 1625.31,1929.17 1734.68,1929.17 1734.68,1909.17
  region: 2054.68,2859.17 2054.68,2879.17 2164.05,2879.17 2164.05,2859.17
  region: 2054.68,2809.17 2054.68,2829.17 2164.05,2829.17 2164.05,2809.17
  region: 2054.68,2759.17 2054.68,2779.17 2164.05,2779.17 2164.05,2759.17
  region: 2054.68,2709.17 2054.68,2729.17 2164.05,2729.17 2164.05,2709.17
  region: 2054.68,2659.17 2054.68,2679.17 2164.05,2679.17 2164.05,2659.17
  region: 2054.68,2609.17 2054.68,2629.17 2164.05,2629.17 2164.05,2609.17
  region: 2054.68,2509.17 2054.68,2529.17 2164.05,2529.17 2164.05,2509.17
  region: 2054.68,2459.17 2054.68,2479.17 2164.05,2479.17 2164.05,2459.17
  region: 2054.68,2409.17 2054.68,2429.17 2164.05,2429.17 2164.05,2409.17
  region: 2054.68,2359.17 2054.68,2379.17 2164.05,2379.17 2164.05,2359.17
  region: 2054.68,2309.17 2054.68,2329.17 2164.05,2329.17 2164.05,2309.17
  region: 2054.68,2259.17 2054.68,2279.17 2164.05,2279.17 2164.05,2259.17
  region: 2054.68,2209.17 2054.68,2229.17 2164.05,2229.17 2164.05,2209.17
  region: 2054.68,2159.17 2054.68,2179.17 2164.05,2179.17 2164.05,2159.17
  region: 2054.68,2109.17 2054.68,2129.17 2164.05,2129.17 2164.05,2109.17
  region: 2054.68,2059.17 2054.68,2079.17 2164.05,2079.17 2164.05,2059.17
  region: 2054.68,2009.17 2054.68,2029.17 2164.05,2029.17 2164.05,2009.17
  region: 2054.68,1959.17 2054.68,1979.17 2164.05,1979.17 2164.05,1959.17
  region: 2054.68,1909.17 2054.68,1929.17 2164.05,1929.17 2164.05,1909.17
  region: 2320.95,2809.17 2320.95,2829.17 2430.32,2829.17 2430.32,2809.17
  region: 2320.95,2759.17 2320.95,2779.17 2430.32,2779.17 2430.32,2759.17
  region: 2320.95,2709.17 2320.95,2729.17 2430.32,2729.17 2430.32,2709.17
  region: 2750.32,1909.17 2750.32,1929.17 2859.69,1929.17 2859.69,1909.17
  region: 2750.32,1959.17 2750.32,1979.17 2859.69,1979.17 2859.69,1959.17
  region: 2750.32,2009.17 2750.32,2029.17 2859.69,2029.17 2859.69,2009.17
  region: 2750.32,2059.17 2750.32,2079.17 2859.69,2079.17 2859.69,2059.17
  region: 2750.32,2109.17 2750.32,2129.17 2859.69,2129.17 2859.69,2109.17
  region: 2750.32,2159.17 2750.32,2179.17 2859.69,2179.17 2859.69,2159.17
  region: 2750.32,2209.17 2750.32,2229.17 2859.69,2229.17 2859.69,2209.17
  region: 2750.32,2259.17 2750.32,2279.17 2859.69,2279.17 2859.69,2259.17
  region: 2750.32,2309.17 2750.32,2329.17 2859.69,2329.17 2859.69,2309.17
  region: 2750.32,2359.17 2750.32,2379.17 2859.69,2379.17 2859.69,2359.17
  region: 2750.32,2409.17 2750.32,2429.17 2859.69,2429.17 2859.69,2409.17
  region: 2750.32,2459.17 2750.32,2479.17 2859.69,2479.17 2859.69,2459.17
  region: 2750.32,2509.17 2750.32,2529.17 2859.69,2529.17 2859.69,2509.17
  region: 2750.32,2609.17 2750.32,2629.17 2859.69,2629.17 2859.69,2609.17
  region: 2750.32,2659.17 2750.32,2679.17 2859.69,2679.17 2859.69,2659.17
  region: 2750.32,2709.17 2750.32,2729.17 2859.69,2729.17 2859.69,2709.17
  region: 2750.32,2759.17 2750.32,2779.17 2859.69,2779.17 2859.69,2759.17
  region: 2750.32,2809.17 2750.32,2829.17 2859.69,2829.17 2859.69,2809.17
  region: 2750.32,2859.17 2750.32,2879.17 2859.69,2879.17 2859.69,2859.17
  region: 2320.95,2859.17 2320.95,2879.17 2430.32,2879.17 2430.32,2859.17
  region: 2320.95,2659.17 2320.95,2679.17 2430.32,2679.17 2430.32,2659.17
  region: 2320.95,2609.17 2320.95,2629.17 2430.32,2629.17 2430.32,2609.17
  region: 2320.95,2559.17 2320.95,2579.17 2430.32,2579.17 2430.32,2559.17
  region: 2320.95,2509.17 2320.95,2529.17 2430.32,2529.17 2430.32,2509.17
  region: 2320.95,2459.17 2320.95,2479.17 2430.32,2479.17 2430.32,2459.17
  region: 2320.95,2409.17 2320.95,2429.17 2430.32,2429.17 2430.32,2409.17
  region: 2320.95,2359.17 2320.95,2379.17 2430.32,2379.17 2430.32,2359.17
  region: 2320.95,2309.17 2320.95,2329.17 2430.32,2329.17 2430.32,2309.17
  region: 2320.95,2259.17 2320.95,2279.17 2430.32,2279.17 2430.32,2259.17
  region: 2320.95,2209.17 2320.95,2229.17 2430.32,2229.17 2430.32,2209.17
  region: 2320.95,2159.17 2320.95,2179.17 2430.32,2179.17 2430.32,2159.17
  region: 2320.95,2109.17 2320.95,2129.17 2430.32,2129.17 2430.32,2109.17
  region: 2320.95,2059.17 2320.95,2079.17 2430.32,2079.17 2430.32,2059.17
  region: 2320.95,2009.17 2320.95,2029.17 2430.32,2029.17 2430.32,2009.17
  region: 2320.95,1959.17 2320.95,1979.17 2430.32,1979.17 2430.32,1959.17
  region: 2320.95,1909.17 2320.95,1929.17 2430.32,1929.17 2430.32,1909.17
  region: 3015.95,2859.17 3015.95,2879.17 3125.32,2879.17 3125.32,2859.17
  region: 3015.95,2809.17 3015.95,2829.17 3125.32,2829.17 3125.32,2809.17
  region: 3015.95,2759.17 3015.95,2779.17 3125.32,2779.17 3125.32,2759.17
  region: 3015.95,2709.17 3015.95,2729.17 3125.32,2729.17 3125.32,2709.17
  region: 3015.95,2659.17 3015.95,2679.17 3125.32,2679.17 3125.32,2659.17
  region: 3015.95,2609.17 3015.95,2629.17 3125.32,2629.17 3125.32,2609.17
  region: 3015.95,2559.17 3015.95,2579.17 3125.32,2579.17 3125.32,2559.17
  region: 3015.95,2509.17 3015.95,2529.17 3125.32,2529.17 3125.32,2509.17
  region: 3015.95,2459.17 3015.95,2479.17 3125.32,2479.17 3125.32,2459.17
  region: 3015.95,2409.17 3015.95,2429.17 3125.32,2429.17 3125.32,2409.17
  region: 3015.95,2359.17 3015.95,2379.17 3125.32,2379.17 3125.32,2359.17
  region: 3015.95,2309.17 3015.95,2329.17 3125.32,2329.17 3125.32,2309.17
  region: 3015.95,2259.17 3015.95,2279.17 3125.32,2279.17 3125.32,2259.17
  region: 3015.95,2209.17 3015.95,2229.17 3125.32,2229.17 3125.32,2209.17
  region: 3015.95,2159.17 3015.95,2179.17 3125.32,2179.17 3125.32,2159.17
  region: 3015.95,2109.17 3015.95,2129.17 3125.32,2129.17 3125.32,2109.17
  region: 3015.95,2059.17 3015.95,2079.17 3125.32,2079.17 3125.32,2059.17
  region: 3015.95,2009.17 3015.95,2029.17 3125.32,2029.17 3125.32,2009.17
  region: 3015.95,1959.17 3015.95,1979.17 3125.32,1979.17 3125.32,1959.17
  region: 3015.95,1909.17 3015.95,1929.17 3125.32,1929.17 3125.32,1909.17
  region: 3445.32,2609.17 3445.32,2629.17 3554.69,2629.17 3554.69,2609.17
  region: 3445.32,2659.17 3445.32,2679.17 3554.69,2679.17 3554.69,2659.17
  region: 3445.32,2709.17 3445.32,2729.17 3554.69,2729.17 3554.69,2709.17
  region: 3445.32,2759.17 3445.32,2779.17 3554.69,2779.17 3554.69,2759.17
  region: 3445.32,2809.17 3445.32,2829.17 3554.69,2829.17 3554.69,2809.17
  region: 3445.32,2859.17 3445.32,2879.17 3554.69,2879.17 3554.69,2859.17
  region: 3445.32,2509.17 3445.32,2529.17 3554.69,2529.17 3554.69,2509.17
  region: 3445.32,2459.17 3445.32,2479.17 3554.69,2479.17 3554.69,2459.17
  region: 3445.32,2409.17 3445.32,2429.17 3554.69,2429.17 3554.69,2409.17
  region: 3445.32,2359.17 3445.32,2379.17 3554.69,2379.17 3554.69,2359.17
  region: 3445.32,2309.17 3445.32,2329.17 3554.69,2329.17 3554.69,2309.17
  region: 3445.32,2259.17 3445.32,2279.17 3554.69,2279.17 3554.69,2259.17
  region: 3445.32,2209.17 3445.32,2229.17 3554.69,2229.17 3554.69,2209.17
  region: 3445.32,2159.17 3445.32,2179.17 3554.69,2179.17 3554.69,2159.17
  region: 3445.32,2109.17 3445.32,2129.17 3554.69,2129.17 3554.69,2109.17
  region: 3445.32,2059.17 3445.32,2079.17 3554.69,2079.17 3554.69,2059.17
  region: 3445.32,2009.17 3445.32,2029.17 3554.69,2029.17 3554.69,2009.17
  region: 3445.32,1959.17 3445.32,1979.17 3554.69,1979.17 3554.69,1959.17
  region: 3445.32,1909.17 3445.32,1929.17 3554.69,1929.17 3554.69,1909.17
  region: 3710.95,2859.17 3710.95,2879.17 3820.32,2879.17 3820.32,2859.17
  region: 3710.95,2809.17 3710.95,2829.17 3820.32,2829.17 3820.32,2809.17
  region: 3710.95,2759.17 3710.95,2779.17 3820.32,2779.17 3820.32,2759.17
  region: 3710.95,2709.17 3710.95,2729.17 3820.32,2729.17 3820.32,2709.17
  region: 3710.95,2659.17 3710.95,2679.17 3820.32,2679.17 3820.32,2659.17
  region: 3710.95,2609.17 3710.95,2629.17 3820.32,2629.17 3820.32,2609.17
  region: 3710.95,2559.17 3710.95,2579.17 3820.32,2579.17 3820.32,2559.17
  region: 3710.95,2509.17 3710.95,2529.17 3820.32,2529.17 3820.32,2509.17
  region: 3710.95,2459.17 3710.95,2479.17 3820.32,2479.17 3820.32,2459.17
  region: 3710.95,2409.17 3710.95,2429.17 3820.32,2429.17 3820.32,2409.17
  region: 3710.95,2359.17 3710.95,2379.17 3820.32,2379.17 3820.32,2359.17
  region: 3710.95,2309.17 3710.95,2329.17 3820.32,2329.17 3820.32,2309.17
  region: 3710.95,2259.17 3710.95,2279.17 3820.32,2279.17 3820.32,2259.17
  region: 3710.95,2209.17 3710.95,2229.17 3820.32,2229.17 3820.32,2209.17
  region: 3710.95,2159.17 3710.95,2179.17 3820.32,2179.17 3820.32,2159.17
  region: 3710.95,2109.17 3710.95,2129.17 3820.32,2129.17 3820.32,2109.17
  region: 3710.95,2059.17 3710.95,2079.17 3820.32,2079.17 3820.32,2059.17
  region: 3710.95,2009.17 3710.95,2029.17 3820.32,2029.17 3820.32,2009.17
  region: 3710.95,1959.17 3710.95,1979.17 3820.32,1979.17 3820.32,1959.17
  region: 3710.95,1909.17 3710.95,1929.17 3820.32,1929.17 3820.32,1909.17
  region: 4140.32,2609.17 4140.32,2629.17 4249.69,2629.17 4249.69,2609.17
  region: 4140.32,2659.17 4140.32,2679.17 4249.69,2679.17 4249.69,2659.17
  region: 4140.32,2709.17 4140.32,2729.17 4249.69,2729.17 4249.69,2709.17
  region: 4140.32,2759.17 4140.32,2779.17 4249.69,2779.17 4249.69,2759.17
  region: 4140.32,2809.17 4140.32,2829.17 4249.69,2829.17 4249.69,2809.17
  region: 4140.32,2859.17 4140.32,2879.17 4249.69,2879.17 4249.69,2859.17
  region: 4140.32,2509.17 4140.32,2529.17 4249.69,2529.17 4249.69,2509.17
  region: 4140.32,2459.17 4140.32,2479.17 4249.69,2479.17 4249.69,2459.17
  region: 4140.32,2409.17 4140.32,2429.17 4249.69,2429.17 4249.69,2409.17
  region: 4140.32,2359.17 4140.32,2379.17 4249.69,2379.17 4249.69,2359.17
  region: 4140.32,2309.17 4140.32,2329.17 4249.69,2329.17 4249.69,2309.17
  region: 4140.32,2259.17 4140.32,2279.17 4249.69,2279.17 4249.69,2259.17
  region: 4140.32,2209.17 4140.32,2229.17 4249.69,2229.17 4249.69,2209.17
  region: 4140.32,2159.17 4140.32,2179.17 4249.69,2179.17 4249.69,2159.17
  region: 4140.32,2109.17 4140.32,2129.17 4249.69,2129.17 4249.69,2109.17
  region: 4140.32,2059.17 4140.32,2079.17 4249.69,2079.17 4249.69,2059.17
  region: 4140.32,2009.17 4140.32,2029.17 4249.69,2029.17 4249.69,2009.17
  region: 4140.32,1959.17 4140.32,1979.17 4249.69,1979.17 4249.69,1959.17
  region: 4140.32,1909.17 4140.32,1929.17 4249.69,1929.17 4249.69,1909.17

## Silkscreen, mask and mechanical layers (free items; w line width, h text height)
Top Overlay:
  lines w5.91: 1564.68,1874.17 2219.68,1874.17 ; 1564.68,2914.17 2219.68,2914.17 ; 1739.68,1874.17 1739.68,1889.17 1739.68,2899.17 1739.68,2914.17 ; 2049.68,1874.17 2049.68,1889.17 2049.68,2899.17 2049.68,2914.17 ; 2260.32,1874.17 2915.32,1874.17 ; 2260.32,2914.17 2915.32,2914.17 ; 2435.32,1874.17 2435.32,1889.17 2435.32,2899.17 2435.32,2914.17 ; 2745.32,1874.17 2745.32,1889.17 2745.32,2899.17 2745.32,2914.17 ; 2955.32,1874.17 3610.32,1874.17 ; 2955.32,2914.17 3610.32,2914.17 ; 3130.32,1874.17 3130.32,1889.17 3130.32,2899.17 3130.32,2914.17 ; 3440.32,1874.17 3440.32,1889.17 3440.32,2899.17 3440.32,2914.17 ; 3650.32,1874.17 4305.32,1874.17 ; 3650.32,2914.17 4305.32,2914.17 ; 3825.32,1874.17 3825.32,1889.17 3825.32,2899.17 3825.32,2914.17 ; 4135.32,1874.17 4135.32,1889.17 4135.32,2899.17 4135.32,2914.17 ; 1564.68,1734.17 2139.68,1734.17 2219.68,1814.17 2219.68,3054.17 1564.68,3054.17 1564.68,1734.17 ; 2084.36,1839.17 2104.36,1859.17 2124.36,1839.17 2104.36,1819.17 2084.36,1839.17 ; 2260.32,1734.17 2835.32,1734.17 2915.32,1814.17 2915.32,3054.17 2260.32,3054.17 2260.32,1734.17 ; 2780,1839.17 2800,1859.17 2820,1839.17 2800,1819.17 2780,1839.17 ; 2955.32,1734.17 3530.32,1734.17 3610.32,1814.17 3610.32,3054.17 2955.32,3054.17 2955.32,1734.17 ; 3475,1839.17 3495,1859.17 3515,1839.17 3495,1819.17 3475,1839.17 ; 3650.32,1734.17 4225.32,1734.17 4305.32,1814.17 4305.32,3054.17 3650.32,3054.17 3650.32,1734.17 ; 4170,1839.17 4190,1859.17 4210,1839.17 4190,1819.17 4170,1839.17
  lines w10: 2195,1609.17 2385,1609.17 2385,1689.17 2195,1689.17 2195,1609.17 ; 2490,1609.17 2915,1609.17 2915,1689.17 2490,1689.17 2490,1609.17 ; 2955,1609.17 3380,1609.17 3380,1689.17 2955,1689.17 2955,1609.17
  text "TMU U8 / FBI U16" at 3665,3009.97 h47.24
  text "TMU U7 / FBI U15" at 2965,3009.17 h47.24
  text "TMU U5 / FBI U13" at 1585,3006.07 h47.24
  text "TMU U6 / FBI U14" at 2275,3005.97 h47.24
  text "UP" at 4155,2904.17 h80
  text "TMU 130 / FBI 199" at 1810,1689.17 h39.37 r1
  text "R1 47Ω" at 2620,1629.17 h59.05
  text "R2 47Ω" at 3085,1629.17 h59.05
  text "J1" at 2130,1624.77 h59.05 r1
  text "Maxi Gamer 3D / TMU + FBI MOD" at 3450,1614.92 h48.5
  text "FBI 180" at 1810,1589.17 h39.37
Bottom Overlay:
  lines w5.91: 1564.68,1874.17 2219.68,1874.17 ; 1564.68,2914.17 2219.68,2914.17 ; 1739.68,1874.17 1739.68,1889.17 1739.68,2899.17 1739.68,2914.17 ; 2049.68,1874.17 2049.68,1889.17 2049.68,2899.17 2049.68,2914.17 ; 2260.32,1874.17 2915.32,1874.17 ; 2260.32,2914.17 2915.32,2914.17 ; 2435.32,1874.17 2435.32,1889.17 2435.32,2899.17 2435.32,2914.17 ; 2745.32,1874.17 2745.32,1889.17 2745.32,2899.17 2745.32,2914.17 ; 2955.32,1874.17 3610.32,1874.17 ; 2955.32,2914.17 3610.32,2914.17 ; 3130.32,1874.17 3130.32,1889.17 3130.32,2899.17 3130.32,2914.17 ; 3440.32,1874.17 3440.32,1889.17 3440.32,2899.17 3440.32,2914.17 ; 3650.32,1874.17 4305.32,1874.17 ; 3650.32,2914.17 4305.32,2914.17 ; 3825.32,1874.17 3825.32,1889.17 3825.32,2899.17 3825.32,2914.17 ; 4135.32,1874.17 4135.32,1889.17 4135.32,2899.17 4135.32,2914.17 ; 1564.7,1813.87 1645,1734.17 2139.7,1734.17 2220,1734.17 2219.7,1814.17 2219.7,3054.17 1564.7,3054.17 1564.7,1813.87 ; 2085,1839.17 2105,1859.17 2125,1839.17 2105,1819.17 2085,1839.17 ; 2260.3,1811.87 2340,1734.17 2835.3,1734.17 2915,1734.17 2915.3,1814.17 2915.3,3054.17 2260.3,3054.17 2260.3,1811.87 ; 2780.64,1839.17 2800.64,1859.17 2820.64,1839.17 2800.64,1819.17 2780.64,1839.17 ; 2955.3,1815.47 3035,1734.17 3530.3,1734.17 3610,1734.17 3610.3,1814.17 3610.3,3054.17 2955.3,3054.17 2955.3,1815.47 ; 3475.64,1839.17 3495.64,1859.17 3515.64,1839.17 3495.64,1819.17 3475.64,1839.17 ; 3650.3,1811.17 3730,1734.17 4225.3,1734.17 4305,1734.17 4305.3,1814.17 4305.3,3054.17 3650.3,3054.17 3650.3,1811.17 ; 4170.64,1839.17 4190.64,1859.17 4210.64,1839.17 4190.64,1819.17 4170.64,1839.17
  lines w10: 3610,1549.17 3960,1549.17 ; 3610,1549.17 3610,1684.17 3960,1684.17 ; 3610,1549.17 3890,1549.17 ; 3610,1549.17 3610,1614.17 3890,1614.17 3890,1549.17 ; 3890,1549.17 3960,1549.17 ; 3890,1549.17 3890,1684.17 3960,1684.17 ; 3960,1549.17 3960,1684.17 ; 3960,1549.17 3960,1684.17 ; 3960,1549.17 3960,1684.17 ; 3960,1549.17 3740,1549.17 3740,1684.17 3960,1684.17
  text "TMU U4 / FBI U12" at 4290,3008.07 h47.24
  text "TMU U3 / FBI U11" at 3590,3007.27 h47.24
  text "TMU U1 / FBI U9" at 2210,3004.17 h47.24
  text "TMU U2 / FBI U10" at 2900,3004.07 h47.24
  text "DOWN" at 1900,2904.17 h80
  text "FBI 124" at 4115,2559.17 h39.37
  text "FBI 125" at 2030,2554.17 h39.37
  text "FBI 125" at 2730,2554.17 h39.37
  text "FBI 124" at 3425,2554.17 h39.37
  text "Open" at 3880,1634.17 h59.05 r6
  text "FBI" at 3710,1624.17 h59.05
  text "J1" at 3900,1589.17 h59.05 r269
  text "Close" at 3880,1564.17 h59.05 r2
  text "TMU" at 3730,1559.17 h59.05
  text "REV 1.0" at 3580,1539.49 h39.37
Top Paste:
  drawing of 161 lines, arcs and shapes, not listed
Bottom Paste:
  drawing of 160 lines, arcs and shapes, not listed
Top Solder:
  drawing of 161 lines, arcs and shapes, not listed
Bottom Solder:
  drawing of 160 lines, arcs and shapes, not listed
Document:
  lines w0.1: 2932.49,2299.58 2932.51,2299.6